# EAGLE board turing_alarm_single_side (EAGLE 5.11)
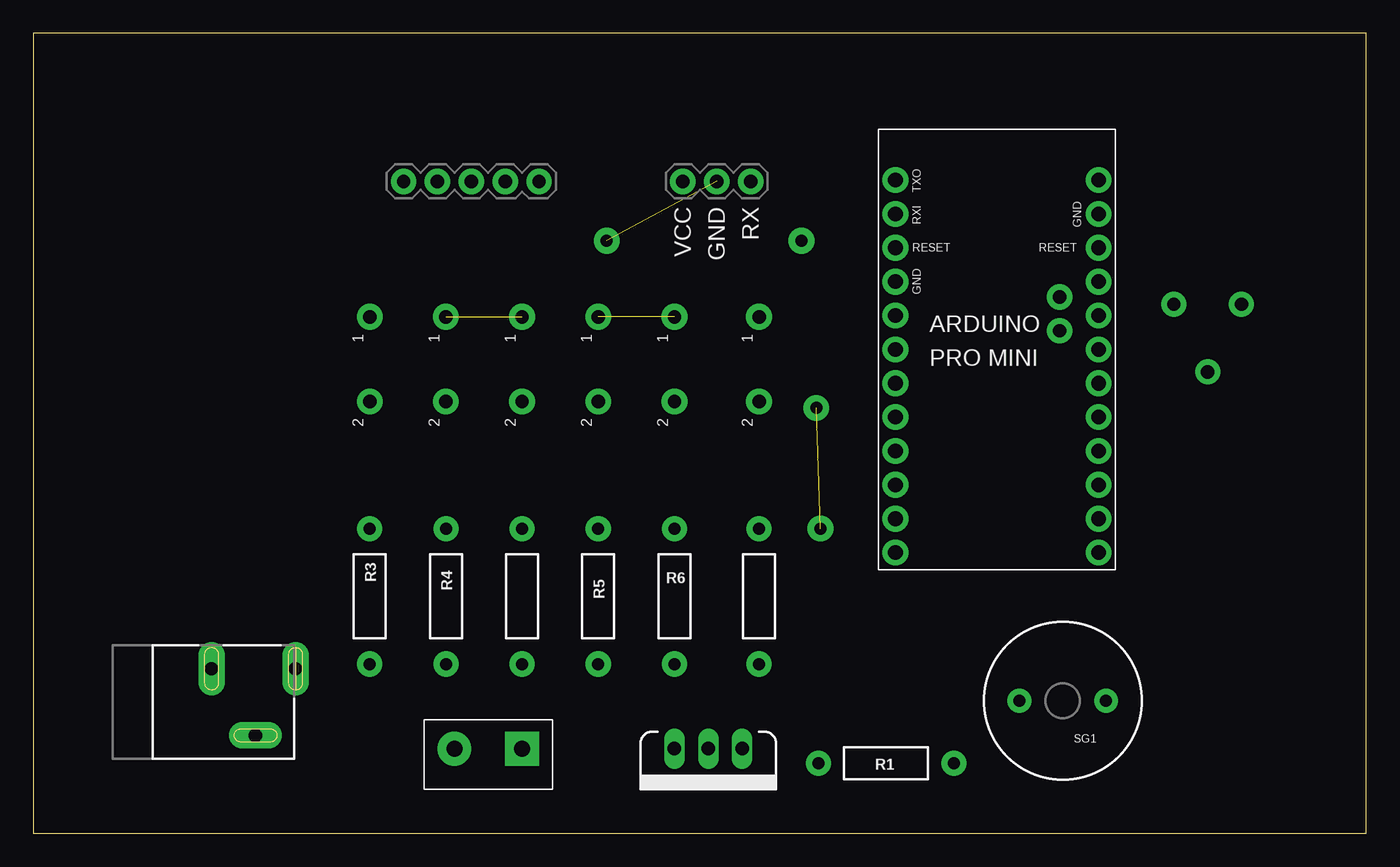
[diagram p0: board, top side]
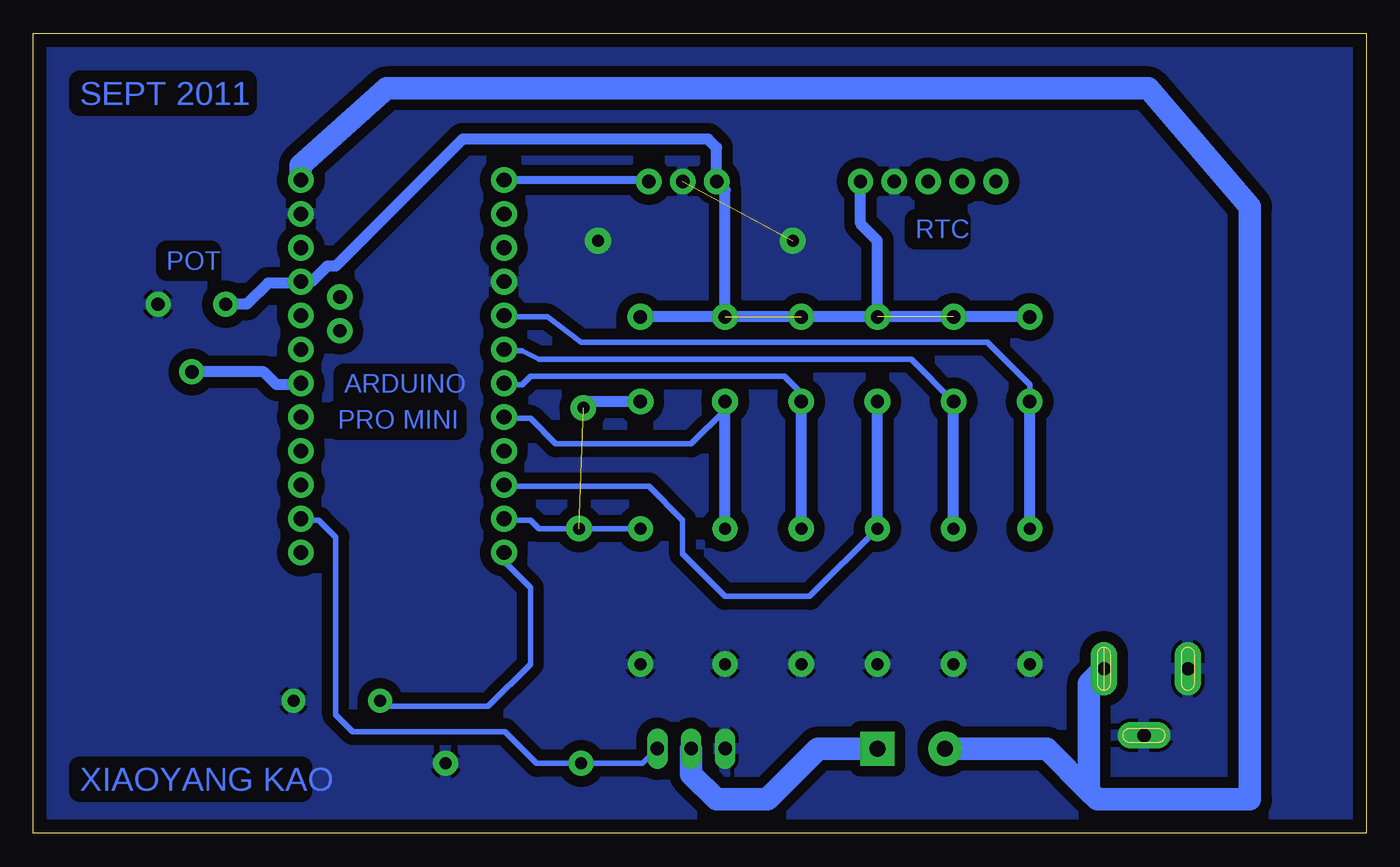
[diagram p1: board, bottom side, seen from below]

Size 100 x 60 mm. Coordinates in mm from the lower left corner, seen from the top.
Outline: 0,0 100,0 100,60 0,60 0,0
Copper layers (1*16): Top 0.035mm / dielectric 1.5mm / Bottom 0.035mm
Design rules "default": minimum track width 10mil, minimum drill 24mil, track to track 8mil, track to pad 8mil, pad to pad 8mil, via to via 8mil, smd to smd 8mil, copper to edge 40mil, drill to drill 8mil, minimum pad ring 10mil, minimum via ring 8mil, stop-mask expansion 4mil, vias tented up to drill 0mil, thermal gap 10mil

## Footprints (pad centres in the part's own frame; a part is rotated, then mirrored left to right if it is on the bottom)
MOMENTARY_SWITCH = drill 1 pad 1.93 round: 1 0,0; 2 6.35,0
POWER_JACK_SLOT = drill 1 pad 2 long: GND@1 2.58,7.5; GND@2 7.58,10.8; PWR 2.58,13.8
TO220V = drill 1.016 long: 1 -2.54,0; 2 0,0; 3 2.54,0
AXIAL-0.4 = drill 0.9 pad 1.88 round: P$1 -5.08,0; P$2 5.08,0
TRIM_POT = drill 1 pad 1.88 round: 1 5.08,0; 2 0,2.54; 3 0,-2.54
BUZZER-12MM = drill 0.9 pad 1.778 round: + 3.25,0; - -3.25,0
ARDUINO_PRO_MINI_5V = drill 1.1 pad 1.93 round: 2 -5.08,17.78; 3 -5.08,15.24; 4 -5.08,12.7; 5 -5.08,10.16; 6 -5.08,7.62; 7 -5.08,5.08; 8 -5.08,2.54; 9 -5.08,0; 10 10.16,0; 11 10.16,2.54; 12 10.16,5.08; 13 10.16,7.62; A0 10.16,10.16; A1 10.16,12.7; A2 10.16,15.24; A3 10.16,17.78; GND1 -5.08,20.32; GND2 10.16,25.4; RAW 10.16,27.94; RESET -5.08,22.86; RESET2 10.16,22.86; RXI -5.08,25.4; TXO -5.08,27.94; VCC2 10.16,20.32 | drill 1 pad 1.905 round: A4 7.239,16.637; A5 7.239,19.177
SERIAL_LCD_16X2 = drill 1 pad 1.905 round: GND 1.27,3.81; RX 1.27,6.35; VCC 1.27,1.27
RTC_MODULE_DS1307 = drill 1 pad 1.905 round: GND 1.27,3.81; SCL 1.27,8.89; SDA 1.27,11.43; SQW 1.27,6.35; VCC 1.27,1.27
LED_STRIP = drill 1.2 pad 2.54 round: A 2.54,0 | drill 1.2 pad 2.54 square: C -2.54,0

## Placement (x,y rotation side)
DECREASE  MOMENTARY_SWITCH  [MOMENTARY_SWITCH]  30.96,38.73 270 top
INCREASE  MOMENTARY_SWITCH  [MOMENTARY_SWITCH]  25.24,38.73 270 top
LEDSUPPLY  POWER_JACKSLT  [POWER_JACK_SLOT]  5.87,14.92 270 top
LEFT  MOMENTARY_SWITCH  [MOMENTARY_SWITCH]  42.39,38.73 270 top
OK  MOMENTARY_SWITCH  [MOMENTARY_SWITCH]  54.45,38.73 270 top
Q1  MOSFET-NCHANNELPTH2  [TO220V]  50.64,6.35 180 top
R1  [AXIAL-0.4]  63.98,5.24 180 top
R2  [TRIM_POT]  88.11,39.69 270 top
R3  [AXIAL-0.4]  25.24,17.78 270 top
R4  [AXIAL-0.4]  30.96,17.78 270 top
R5  [AXIAL-0.4]  42.39,17.78 270 top
R6  [AXIAL-0.4]  48.1,17.78 270 top
R7  [AXIAL-0.4]  54.45,17.78 270 top
R8  [AXIAL-0.4]  36.67,17.78 270 top
RIGHT  MOMENTARY_SWITCH  [MOMENTARY_SWITCH]  48.1,38.73 270 top
SG1  BUZZERPTH  [BUZZER-12MM]  77.23,9.94 180 top
SNOOZE  MOMENTARY_SWITCH  [MOMENTARY_SWITCH]  36.67,38.73 270 top
U$1  ARDUINO_PRO_MINI_5V  [ARDUINO_PRO_MINI_5V]  69.77,21.06 0 top
U$2  SERIAL_LCD_16X2  [SERIAL_LCD_16X2]  47.47,50.16 270 top
U$3  RTC_MODULE_DS1307  [RTC_MODULE_DS1307]  39.21,47.62 90 top
U$4  LED_STRIP  [LED_STRIP]  34.13,6.35 180 top

## Library data of the parts
DECREASE INCREASE LEFT OK RIGHT SNOOZE U$1-U$4 = XYKlib
LEDSUPPLY Q1 R1-R8 SG1 = SparkFun

## Nets
2: INCREASE.2 R3.P$1 U$1.2
3: DECREASE.2 R4.P$1 U$1.3
4: LEFT.2 R5.P$1 U$1.4
5: R6.P$1 RIGHT.2 U$1.5
7: R8.P$1 SNOOZE.2 U$1.7
8: OK.2 R7.P$1 U$1.8
GND: LEDSUPPLY.GND@1 LEDSUPPLY.GND@2 Q1.3 R1.P$1 R2.2 R3.P$2 R4.P$2 R5.P$2 R6.P$2 R7.P$2 R8.P$2 SG1.- U$1.GND1 U$1.GND2 U$2.GND U$3.GND
N$1: U$1.TXO U$2.RX
N$4: SG1.+ U$1.9
N$5: Q1.1 R1.P$2 U$1.11
N$7: Q1.2 U$4.C
N$8: R2.1 U$1.A1
V+: LEDSUPPLY.PWR U$1.RAW U$4.A
VCC: DECREASE.1 INCREASE.1 LEFT.1 OK.1 R2.3 RIGHT.1 SNOOZE.1 U$1.VCC2 U$2.VCC U$3.VCC

## Tracks (layer width: path | path; a pad name or v marks a point on that pad's centre or on a via)
2
  Bottom 0.406: INCREASE.2 25.24,33.66 28.42,36.83 58.9,36.83 61.44,38.73 64.59,38.73 U$1.2
  Bottom 0.813: R3.P$1 INCREASE.2
3
  Bottom 0.406: DECREASE.2 34.13,35.56 62.07,35.56 63.34,36.2 64.59,36.2 U$1.3
  Bottom 0.813: R4.P$1 DECREASE.2
4
  Bottom 0.406: LEFT.2 42.39,33.02 43.66,34.29 62.71,34.29 63.34,33.66 64.59,33.66 U$1.4
  Bottom 0.813: R5.P$1 LEFT.2
5
  Bottom 0.406: RIGHT.2 48.1,31.75 50.64,29.21 60.8,29.21 62.71,31.11 64.59,31.11 U$1.5
  Bottom 0.813: R6.P$1 RIGHT.2
7
  Bottom 0.406: R8.P$1 41.75,17.78 48.1,17.78 51.28,20.95 51.28,23.5 53.82,26.04 64.59,26.04 U$1.7
  Bottom 0.813: R8.P$1 SNOOZE.2
8  (via drill 0.9 pad 1.93)  (1 unrouted)
  Bottom 0.406: R7.P$1 v59.05,22.86 62.07,22.86 62.71,23.5 64.59,23.5 U$1.8
  Bottom 0.813: OK.2 58.74,32.38 v58.74,31.91
GND  (via drill 0.9 pad 1.93)  (1 unrouted)
  other vias: 43.02,44.45 57.63,44.45
  pour Bottom (isolate 0.813): 0,60 100.33,60.33 100.33,0 0,0
N$1
  Bottom 0.61: U$1.TXO 53.92,49 U$2.RX
N$4
  Bottom 0.406: U$1.9 64.69,20.4 62.71,18.41 62.71,12.7 65.88,9.53 73.57,9.53 SG1.+
N$5
  Bottom 0.406: Q1.1 54.29,5.24 R1.P$2 62.23,5.24 64.61,7.62 76.04,7.62 77.31,8.89 77.31,22.23 78.58,23.5 79.83,23.5 U$1.11
N$7
  Bottom 1.676: U$4.C 41.12,6.35 44.93,2.54 48.74,2.54 50.64,4.45 Q1.2
N$8
  Bottom 0.813: R2.1 82.71,34.61 81.76,33.66 80.03,33.66 U$1.A1
V+
  Bottom 1.676: LEDSUPPLY.PWR 20.8,11.22 20.8,3.17 | 20.8,3.17 20.16,2.54 8.73,2.54 8.73,46.99 16.35,55.88 73.5,55.88 79.93,50.09 U$1.RAW | 20.8,3.17 23.97,6.35 U$4.A
VCC  (2 unrouted)
  Bottom 0.813: INCREASE.1 SNOOZE.1 | SNOOZE.1 RIGHT.1 | SNOOZE.1 36.67,44.45 37.94,45.72 U$3.VCC | R2.3 83.98,39.69 82.39,41.27 80.03,41.27 U$1.VCC2 79.11,41.38 77.95,42.55 77.31,42.55 67.79,52.07 49.37,52.07 48.74,51.44 U$2.VCC 48.1,48.26 RIGHT.1 | RIGHT.1 OK.1

## Text on the board
Bottom: SEPT 2011 | RTC | POT | ARDUINO | PRO MINI | XIAOYANG KAO
_tsilk: 33463 | BUZZER | R3 | R4 | R8 | R5 | VCC | GND | ARDUINO | RX | PRO MINI | VCC | GND | R6 | R7 | R1 | SQW | SCL | SDA | POT | - | + | - | DC JACK | + | -
_bsilk: 082811-1 | Turing Alarm | Xiaoyang Kao